# Altium PCB JacdacRgbBar8Ec30 alt 1 122.PcbDoc
Units mm, origin at the board's own origin, x right, y up, seen from the top; angles counter-clockwise.
Board outline 16.5 x 75 mm, 2 copper layers (Top Layer, Bottom Layer), stack 1.525 mm thick; 39 components, 18 nets, 114 pads, 15 vias.
Unrouted connection lines stored in the file: 7.
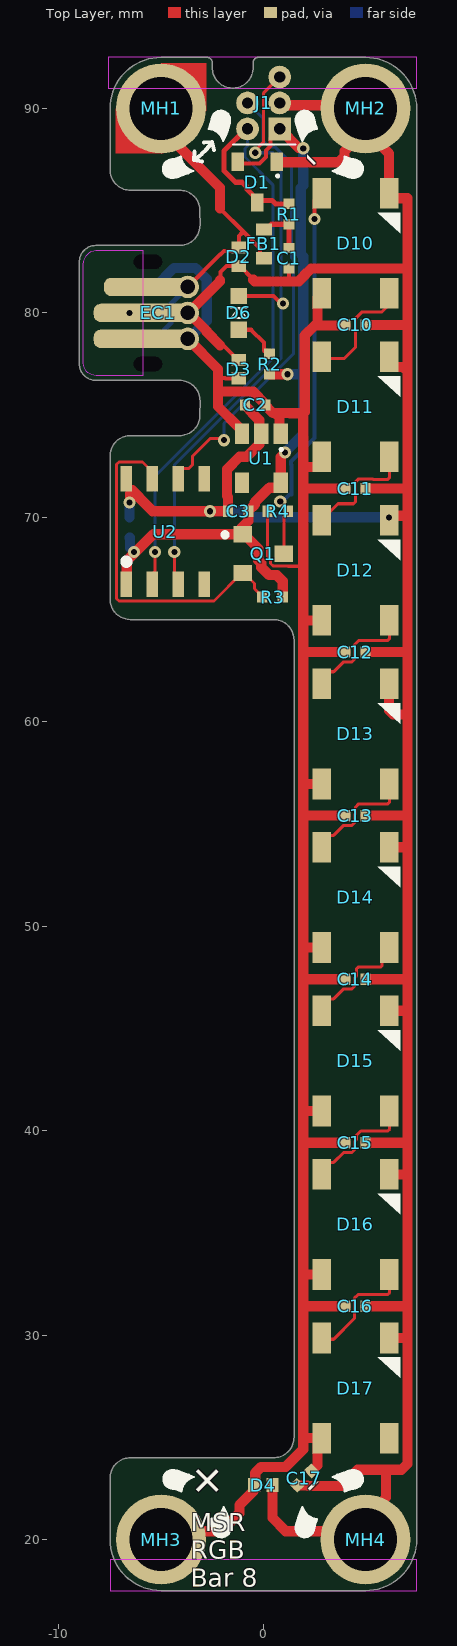
[diagram p0: Top Layer view]
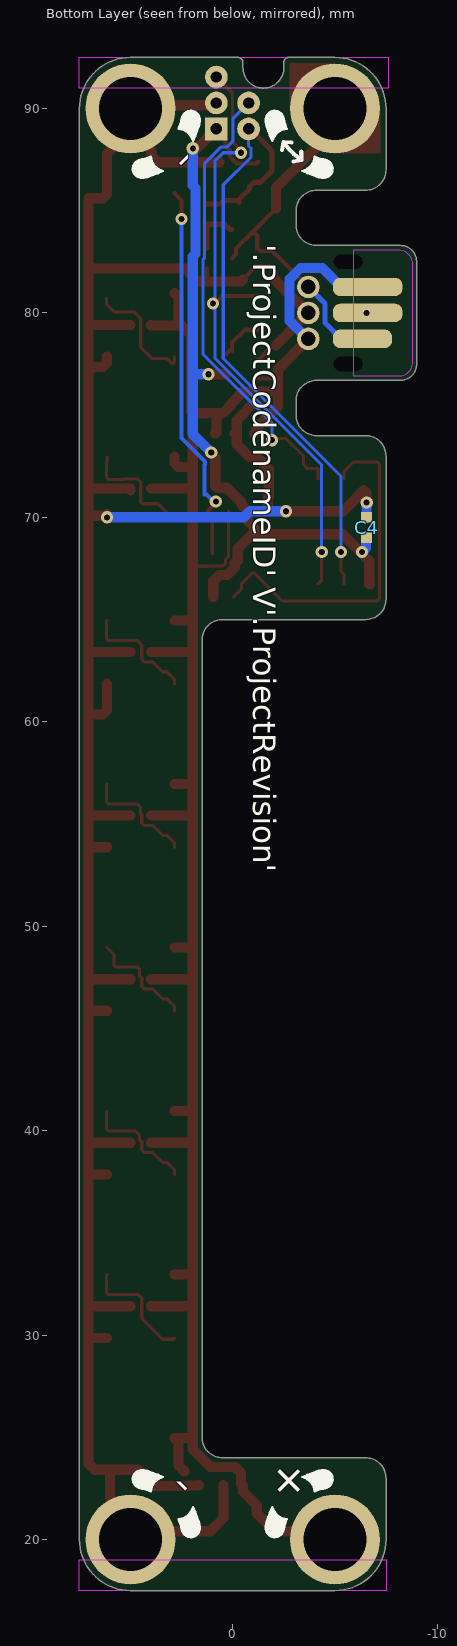
[diagram p1: Bottom Layer view, seen from below]

## Layer stack, top to bottom
Top Solder: solder mask 0.0102, Solder Resist, Dk 3.5
Top Layer: signal copper 0.0356
Dielectric 1: core 1.454, FR-4, Dk 4.2
Bottom Layer: signal copper 0.0356
Bottom Solder: solder mask 0.0102, Solder Resist, Dk 3.5

## Board outline
-7.5,23 cw(c-6.5,23) -6.5,24 0.5,24 ccw(c0.5,25) 1.5,25 1.5,64 ccw(c0.5,64) 0.5,65 -6.5,65 cw(c-6.5,66) -7.5,66 -7.5,73 cw(c-6.5,73) -6.5,74 -4.1,74 ccw(c-4.1,75) -3.1,75 -3.1,75.7 ccw(c-4.1,75.7) -4.1,76.7 -8.2,76.7 cw(c-8.2,77.5) -9,77.5 -9,82.5 cw(c-8.2,82.5) -8.2,83.3 -4.1,83.3 -4.098,83.3 ccw(c-4.098,84.3) -3.098,84.3 -3.1,84.3 -3.1,85 ccw(c-4.1,85) -4.1,86 -6.5,86 cw(c-6.5,87) -7.5,87 -7.5,86.97 -7.5,90 cw(c-5,90) -5,92.5 -2.75,92.5 cw(c-2.75,92.25) -2.5,92.25 -2.5,92 ccw(c-1.5,92) -0.5,92 -0.5,92.25 cw(c-0.25,92.25) -0.25,92.5 5,92.5 cw(c5,90) 7.5,90 7.5,84 7.5,20 cw(c5,20) 5,17.5 -5,17.5 cw(c-5,20) -7.5,20

## Design rules (kind name [scope] priority, off if disabled: settings)
AssemblyTestPointUsage [All] p1: valid=2
BoardOutlineClearance [All] p1: gap=0.3 ignorepadtopadclearanceinfootprint=FALSE except(0: Arc-SplitContinuation Track-SplitContinuation SMDPad-SplitContinuation THPad-SplitContinuation Via-SplitContinuation Fill-SplitContinuation Poly-SplitContinuation Region-OutlineEdge Region-SplitContinuation Text-OutlineEdge Text-SplitContinuation; 0.2: Track-OutlineEdge Fill-CavityEdge Fill-CutoutEdge Fill-SplitBarrior Poly-CavityEdge Poly-CutoutEdge Poly-SplitBarrior Text-CavityEdge Text-CutoutEdge Text-SplitBarrior; 0.25: SMDPad-OutlineEdge)
Clearance [All] p1: gap=0.125 ignorepadtopadclearanceinfootprint=FALSE except(0: Arc-Hole Track-Hole SMDPad-Hole THPad-Hole Via-Hole Fill-Hole Poly-Hole Region-Hole Text-Hole)
ComponentClearance [All] p1: gap=0.1 collisioncheckmode=3 verticalgap=0.254 showdistances=FALSE
DiffPairsRouting [All] p1: maxlimit=2 minlimit=0.15 mostfreqgap=0.15 toplayer_minwidth=0.15 toplayer_maxwidth=2 toplayer_prefwidth=0.15 bottomlayer_minwidth=0.15 bottomlayer_maxwidth=2 bottomlayer_prefwidth=0.15 substack1={CB9D278B-8BF5-444A-AAF4-837A2A9DF42D} toplayer_{cb9d278b-8bf5-444a-aaf4-837a2a9df42d}_minwidth=0.381 toplayer_{cb9d278b-8bf5-444a-aaf4-837a2a9df42d}_maxwidth=0.381 toplayer_{cb9d278b-8bf5-444a-aaf4-837a2a9df42d}_prefwidth=0.381 bottomlayer_{cb9d278b-8bf5-444a-aaf4-837a2a9df42d}_minwidth=0.381 bottomlayer_{cb9d278b-8bf5-444a-aaf4-837a2a9df42d}_maxwidth=0.381 bottomlayer_{cb9d278b-8bf5-444a-aaf4-837a2a9df42d}_prefwidth=0.381 substack2={826B8647-A721-4255-895A-19F9591B9CD1} toplayer_{826b8647-a721-4255-895a-19f9591b9cd1}_minwidth=0.381 toplayer_{826b8647-a721-4255-895a-19f9591b9cd1}_maxwidth=0.381 toplayer_{826b8647-a721-4255-895a-19f9591b9cd1}_prefwidth=0.381 bottomlayer_{826b8647-a721-4255-895a-19f9591b9cd1}_minwidth=0.381 bottomlayer_{826b8647-a721-4255-895a-19f9591b9cd1}_maxwidth=0.381 bottomlayer_{826b8647-a721-4255-895a-19f9591b9cd1}_prefwidth=0.381 substack3={E64FCAF4-1BC8-437D-B1E0-0E5F2DC0F59E} toplayer_{e64fcaf4-1bc8-437d-b1e0-0e5f2dc0f59e}_minwidth=0.381 toplayer_{e64fcaf4-1bc8-437d-b1e0-0e5f2dc0f59e}_maxwidth=0.381 toplayer_{e64fcaf4-1bc8-437d-b1e0-0e5f2dc0f59e}_prefwidth=0.381 bottomlayer_{e64fcaf4-1bc8-437d-b1e0-0e5f2dc0f59e}_minwidth=0.381 bottomlayer_{e64fcaf4-1bc8-437d-b1e0-0e5f2dc0f59e}_maxwidth=0.381 bottomlayer_{e64fcaf4-1bc8-437d-b1e0-0e5f2dc0f59e}_prefwidth=0.381 substack4={E61CE66C-507C-4E1E-8E83-C905434AFC1C} toplayer_{e61ce66c-507c-4e1e-8e83-c905434afc1c}_minwidth=0.381 toplayer_{e61ce66c-507c-4e1e-8e83-c905434afc1c}_maxwidth=0.381 toplayer_{e61ce66c-507c-4e1e-8e83-c905434afc1c}_prefwidth=0.381 bottomlayer_{e61ce66c-507c-4e1e-8e83-c905434afc1c}_minwidth=0.381 bottomlayer_{e61ce66c-507c-4e1e-8e83-c905434afc1c}_maxwidth=0.381 bottomlayer_{e61ce66c-507c-4e1e-8e83-c905434afc1c}_prefwidth=0.381 maxuncoupledlength=25
FabricationTestPointUsage [All] p1: valid=2 allowmultiple=FALSE
HoleSize [All] p1: absolutevalues=TRUE maxlimit=3.1 minlimit=0.2 maxpercent=80.000 minpercent=20.000
MinimumSolderMaskSliver [All] p1: minsoldermaskwidth=0.005
PlaneClearance [All] p1: clearance=0.3
PlaneConnect [All] p1: planeconnectstyle=Relief reliefexpansion=0.5 reliefentries=4 reliefconductorwidth=0.2 reliefairgap=0.3
PolygonConnect "PolygonConnect GND" [isVIA] p1: connectstyle=Relief reliefconductorwidth=0.2 reliefentries=4 polygonreliefangle="90 Angle" airgapwidth=0.2
PolygonConnect [All] p2: connectstyle=Relief reliefconductorwidth=0.2 reliefentries=4 polygonreliefangle="90 Angle" airgapwidth=0.2
RoutingVias [All] p1: holewidth=0.3 width=0.6 viastyle="Through Hole" minholewidth=0.3 minwidth=0.6 maxholewidth=0.5 maxwidth=0.8
SilkToSilkClearance [All] p1: silktosilkclearance=0.001
SilkToSolderMaskClearance [IsPad] p1: minsilkscreentomaskgap=0.05 clearancetoexposedcopper=TRUE
SolderMaskExpansion [All] p1: expansion=0.075 istentingtop=FALSE
Width [All] p1: maxlimit=2 minlimit=0.15 preferedwidth=0.15 substack1={CB9D278B-8BF5-444A-AAF4-837A2A9DF42D} substack2={826B8647-A721-4255-895A-19F9591B9CD1} substack3={E64FCAF4-1BC8-437D-B1E0-0E5F2DC0F59E} substack4={E61CE66C-507C-4E1E-8E83-C905434AFC1C} minimp=50.000000 maximp=50.000000 favimp=50.000000
20 further rules are at their usual default settings.

## Components (designator, comment, footprint, x,y, rotation, side; value= is the part's Value field where it differs from the comment)
C1 "CL05C330JB5NNNC" "C0402_0.55MM - without outline" 1.25,82.676 r90 top
C2 "CL05A105KP5NNNC" "C0402_0.55MM - without outline" -0.4,75.5 r0 top
C3 "CL05A105KP5NNNC" "C0402_0.55MM - without outline" -1.225,70.3 r0 top
C4 "CL05A105KP5NNNC" "C0402_0.55MM - without outline" -6.55,69.5 r270 bottom
C10 "CL05B104KP5NNNC" "C0402_0.55MM - without outline" 4.5,79.409 r180 top
C11 "CL05B104KP5NNNC" "C0402_0.55MM - without outline" 4.5,71.409 r180 top
C12 "CL05B104KP5NNNC" "C0402_0.55MM - without outline" 4.5,63.409 r180 top
C13 "CL05B104KP5NNNC" "C0402_0.55MM - without outline" 4.5,55.41 r180 top
C14 "CL05B104KP5NNNC" "C0402_0.55MM - without outline" 4.5,47.41 r180 top
C15 "CL05B104KP5NNNC" "C0402_0.55MM - without outline" 4.5,39.409 r180 top
C16 "CL05B104KP5NNNC" "C0402_0.55MM - without outline" 4.5,31.41 r180 top
C17 "CL05B104KP5NNNC" "C0402_0.55MM - without outline" 2,23.007 r45 top
D1 "BAT54S" "NXP-BAT54S-TO-236AB - WITHOUT OUTLINE" -0.3,86.4 r270 top
D2 "RCLAMP0521P-N" "TVS 0402 - XL" -1.2,82.75 r270 top
D3 "RCLAMP0521P-N" "TVS 0402 - XL" -1.2,77.25 r90 top
D4 "RCLAMP0521P-N" "TVS 0402 - XL" 0,22.662 r0 top
D6 "Everlight Elec'''" "0603 Orange - without outline" -1.2,80 r270 top
D10 "WS2812E" WS2812E-5050 4.5,83.409 r90 top
D11 "WS2812E" WS2812E-5050 4.5,75.409 r90 top
D12 "WS2812E" WS2812E-5050 4.5,67.409 r90 top
D13 "WS2812E" WS2812E-5050 4.5,59.409 r90 top
D14 "WS2812E" WS2812E-5050 4.5,51.41 r90 top
D15 "WS2812E" WS2812E-5050 4.5,43.41 r90 top
D16 "WS2812E" WS2812E-5050 4.5,35.41 r90 top
D17 "WS2812E" WS2812E-5050 4.5,27.41 r90 top
EC1 "3 pin JACDAC edge connector" JACDAC_EDGE_CONNECTOR_NO_TRACES -3.15,80 r90 top
FB1 "TDK MPZ1608S102ATA00" "TDK MPZ1608 0.8mm - without outline" 0.03,83.375 r90 top
J1 "Hack Connect Mini 1.27 mm pitch 2-row" HACK_CONNECT_MINI_5_X_1_27_0.559mm_TH 0.8,89 r0 top
MH1 "MH_7.0MMK_4.4MMC_3.1MMD_PTH" MH_7.0MMK_4.4MMC_3.1MMD_PTH -5,90 r0 top
MH2 "MH_7.0MMK_4.4MMC_3.1MMD_PTH" MH_7.0MMK_4.4MMC_3.1MMD_PTH 5,90 r180 top
MH3 "MH_7.0MMK_4.4MMC_3.1MMD_PTH" MH_7.0MMK_4.4MMC_3.1MMD_PTH -5,20 r0 top
MH4 "MH_7.0MMK_4.4MMC_3.1MMD_PTH" MH_7.0MMK_4.4MMC_3.1MMD_PTH 5,20 r180 top
Q1 "2N7002K" SOT-23 0,68.226 r0 top
R1 "RC0402FR-07220RL" "R0402 - Without outline" 1.25,84.837 r270 top
R2 "RC0402FR-071KL" "R0402 - Without outline" 0.301,77.5 r270 top
R3 "10k" "R0402 - Without outline" 0.45,66.1 r180 top
R4 "10k" "R0402 - Without outline" 0.7,70.3 r0 top
U1 "LDO 3.3V/300 mA" "ON_SEMI-SOT23-5 - WITHOUT OUTLINE" -0.1,72.9 r270 top
U2 "PFS122-S08" SOP-8 -4.8,69.307 r90 top

## Footprints (in the part's own frame and the unit in brackets; to place one, negate y for a bottom-side part, rotate by r counter-clockwise, add the part's x,y. Pads: shape width x height; smd on the part's side, far side on the other; paste and mask are expansions set on the pad)
"0603 Orange - without outline" [mm]
  rect 0.8x0.8 smd paste-0.05: 1(-0.825,0) 2(0.825,0)
  silkscreen extent -0.25,-0.38 0.25,0.38, body extent -0.8,-0.4 0.8,0.4, height 0.54
"C0402_0.55MM - without outline" [mm]
  rect 0.5x0.55 smd: 1(-0.5,0) 2(0.5,0)
  body extent -0.5,-0.25 0.5,0.25, height 0.55
HACK_CONNECT_MINI_5_X_1_27_0.559mm_TH [mm] "50mil by 62mil pitch 22mil TH"
  rect 1.11x1.11 hole 0.559: 1(0,0)
  round 1.11 hole 0.559: 2(-1.575,0) 3(0,1.27) 4(-1.575,1.27) 5(0,2.54)
  silkscreen extent -2.29,-0.76 0.76,-0.76
JACDAC_EDGE_CONNECTOR_NO_TRACES [mm] "Jacdac 3 pin connector with no traces"
  rrect78% 0.9x2.9 smd far side paste-1 mask+0: 1(-1.27,3.2)
  rrect78% 0.9x4.3 smd paste-1 mask+0: 1(1.27,2.5)
  round 1.1 hole 0.71 paste-0.254 mask+0: 1(1.27,0.55) 2(0,0.55) 3(-1.27,0.55)
  rrect78% 0.9x3.4 smd far side paste-1 mask+0: 2(0,3.45) 2(0,3.45) 3(1.27,3.45)
  rrect78% 0.9x4.8 smd paste-1 mask+0: 2(0,2.75) 3(-1.27,2.75)
  round 0 hole 0.7 slot 1.4 at 90 deg unplated: ""(-2.5,2.5) ""(2.5,2.5)
  Top Layer keep-out region: -3.075,2.75 -3.07,5.033 -2.987,5.341 -2.761,5.567 -2.453,5.65 -2.453,5.65 2.27,5.65 2.545,5.635 2.794,5.516 2.978,5.31 3.07,5.05 3.07,5.05 3.07,2.75
  Bottom Layer lines w0.2: -1.27,0.85 -1.126,0.85
  Bottom Layer keep-out region: -3.07,2.75 -3.07,5.033 -3.023,5.269 -2.889,5.469 -2.689,5.603 -2.453,5.65 -2.453,5.65 2.27,5.65 2.546,5.635 2.794,5.516 2.978,5.31 3.07,5.05 3.07,5.05 3.07,2.75
MH_7.0MMK_4.4MMC_3.1MMD_PTH [mm] "Jacdac mounting hole 7.0mm clearance, 4.4 annualar ring and 3.1mm PTH"
  round 4.4 hole 3.08 mask+0.3: 1(0,0)
"NXP-BAT54S-TO-236AB - WITHOUT OUTLINE" [mm] "SOT23, 3-Leads, Body 2.90x2.30mm, Pitch 0.95mm, IPC Medium Density"
  rect 0.9x0.6 smd: 1(-1,0.95) 2(-1,-0.95) 3(1,0)
  silkscreen extent -0.35,0.95 -0.25,1.05, body extent -1.32,-1.5 1.32,1.5, height 1.12
"ON_SEMI-SOT23-5 - WITHOUT OUTLINE" [mm]
  rect 1x0.7 smd: 1(-1.2,0.95) 2(-1.2,0) 3(-1.2,-0.95) 4(1.2,-0.95) 5(1.2,0.95)
  silkscreen extent -0.47,0.93 -0.38,1.02, body extent -1.5,-1.57 1.5,1.58, height 1.1
"R0402 - Without outline" [mm]
  rect 0.5x0.55 smd: 1(-0.5,0) 2(0.5,0)
  body extent -0.5,-0.25 0.5,0.25, height 0.35
SOP-8 [mm] "Pitch:1.27mm,Width:150mil"
  rect 1.25x0.55 smd: 1(-2.575,1.905) 2(-2.575,0.635) 3(-2.575,-0.635) 4(-2.575,-1.905) 5(2.575,-1.905) 6(2.575,-0.635) 7(2.575,0.635) 8(2.575,1.905)
  silkscreen extent -1.52,1.85 -1.43,1.95, body extent -3,-2.55 3,2.54, height 1.3
SOT-23 [mm] "SOT23, 3-Leads, Body 2.90x2.45mm, Pitch 0.95mm, IPC Medium Density"
  rect 0.9x0.8 smd: 1(-1,0.95) 2(-1,-0.95) 3(1,0)
  silkscreen extent -1.97,0.83 -1.78,1.02, body extent -1.27,-1.5 1.23,1.5, height 1.1
"TDK MPZ1608 0.8mm - without outline" [mm]
  rect 0.6x0.8 smd paste-0.1: 1(-0.7,0) 2(0.7,0)
  body extent -0.8,-0.4 0.8,0.4, height 0.8
"TVS 0402 - XL" [mm] "TVS 0402 RoHS"
  rect 0.6x0.7 smd paste-0.06 mask+0.05: 1(-0.45,0) 2(0.45,0)
  body extent -0.5,-0.3 0.5,0.3, height 0.5
WS2812E-5050 [mm] "SMD-5050 Light Emitting Diodes"
  rect 1.5x0.9 smd: 1(-2.45,1.65) 2(-2.45,-1.65) 3(2.45,-1.65) 4(2.45,1.65)
  silkscreen extent 0.5,-2.2 1.5,-1.1, body extent -2.68,-2.45 2.67,2.5, height 1.5

## Part data
C1: "CAP CER 33PF 50V C0G/NP0 0402", Capacitance=33pF, Case Code (Imperial)=0402, Case Code (Metric)=1005, Dielectric=C0G, Manufacturer=Samsung, Max Operating Temperature=125°C, Min Operating Temperature=-55°C, Package Quantity=1, Supplier Part Number 1=1276-1272-1-ND, Temperature Coefficient=300ppm/°C, Tolerance=5%, Voltage=50V, Case/Package=0402, Category="Ceramic Capacitors", ComponentLink1Description="Online datasheet", ComponentLink1URL=https://datasheet.ciiva.com/15195/getdatasheetpartid-355282-15195687.pdf, Construction=Flat, Contact Plating=Tin, Depth=0.5mm, Height=0.5mm, Lead Free="Lead Free", Length=1mm, Manufacturer Part Number=CL05C330JB5NNNC, Material=Ceramic, Mount="Surface Mount", Packaging="Tape and Reel", Pricing 1="1=0.10000, 10=0.02300, 50=0.01260, 100=0.01040, 500=0.00740, 1000=0.00582, 2500=0.00529, 5000=0.00487 (USD)", Pricing 2="1=0.12500, 25=0.02900, 100=0.01300, 250=0.01100, 500=0.00900, 1000=0.00600 (USD)", Pricing 3="1=0.10000, 10=0.01400, 50=0.01400, 100=0.01100, 1000=0.00600, 10000=0.00400 (USD)", Pricing 4="150=0.01120, 500=0.00860, 2500=0.00640, 5000=0.00550 (GBP)", Radiation Hardening=No, RoHS=Yes, RoHS Compliant=Yes, Series=CL, Stock 1=5436088, Stock 2=45340, Stock 3=8877, Stock 4=10934, Supplier 1=Digi-Key, Supplier 2=Newark, Supplier 3=Mouser, Supplier 4=Farnell, Supplier Part Number 2=82AC9259, Supplier Part Number 3=187-CL05C330JB5NNNC, Supplier Part Number 4=3013373RL, Thickness=0.022inch, Voltage Rating=50V, Voltage Rating (DC)=50V, Width=0.02inch
C2 C3 C4: "CAP CER 1UF 10V X5R 0402", Capacitance=1µF, Case Code (Imperial)=0402, Case Code (Metric)=1005, Dielectric=X5R, Manufacturer=Samsung, Max Operating Temperature=85°C, Min Operating Temperature=-55°C, Package Quantity=1, Supplier Part Number 1=1276-1076-1-ND, Tolerance=10%, Voltage Rating=10V, Case/Package=0402, Category=Capacitors, Checked=?, ComponentLink1Description="Online datasheet", ComponentLink1URL=https://datasheet.ciiva.com/15195/getdatasheetpartid-358390-15195630.pdf, Contact Plating=Tin, Created=DG, Depth=0.5mm, Height=0.5mm, Length=1mm, Manufacturer Part Number=CL05A105KP5NNNC, Material=Ceramic, Mount="Surface Mount", Packaging="Tape and Reel", Pricing 1="1=0.10000, 10=0.03900, 50=0.02100, 100=0.01720, 500=0.01228, 1000=0.00965, 2500=0.00877, 5000=0.00807 (USD)", Pricing 2="1=0.10000, 10=0.04200, 100=0.01800, 500=0.01300, 1000=0.01000, 2500=0.00900 (USD)", Pricing 3="10=0.02450, 100=0.02000, 500=0.01310, 2500=0.00920, 5000=0.00810, 10000=0.00640, 50000=0.00490 (GBP)", Radiation Hardening=No, RoHS=Yes, Stock 1=5705569, Stock 2=928941, Stock 3=53670, Supplier 1=Digi-Key, Supplier 2=Mouser, Supplier 3=Farnell, Supplier Part Number 2=187-CL05A105KP5NNNC, Supplier Part Number 3=3013329, Thickness=0.022inch, Width=0.02inch
C10 C11 C12 C13 C14 C15 C16 C17: "CAP CER 0.1UF 10V X7R 0402", Capacitance=100nF, Case Code (Imperial)=0402, Case Code (Metric)=1005, Dielectric=X7R, Manufacturer=Samsung, Max Operating Temperature=125°C, Min Operating Temperature=-55°C, Package Quantity=1, Supplier Part Number 1=1276-1002-1-ND, Tolerance=10%, Voltage Rating=10V, Case/Package=0402, Category="Ceramic Capacitors", Checked=?, ComponentLink1Description="Samsung datasheet online", ComponentLink1URL=https://datasheet.ciiva.com/15165/getdatasheetpartid-37100-15165107.pdf, Contact Plating=Tin, Created=DG, Depth=0.5mm, Height=0.5mm, Length=1mm, Manufacturer Part Number=CL05B104KP5NNNC, Mount="Surface Mount", Packaging="Tape and Reel", Pricing 1="1=0.10000, 10=0.02500, 50=0.01380, 100=0.01130, 500=0.00804, 1000=0.00632, 2500=0.00575, 5000=0.00529 (USD)", Pricing 2="10000=0.00400, 20000=0.00400, 50000=0.00400 (USD)", Pricing 3="10=0.01620, 100=0.01310, 500=0.00740, 2500=0.00600, 5000=0.00470, 10000=0.00400, 50000=0.00320 (GBP)", Pricing 4="1=0.09000, 25=0.02300, 100=0.01000, 250=0.00900, 500=0.00700, 1000=0.00500, 2500=0.00500 (USD)", Pricing 5="1=0.00460, 500=0.00340, 1500=0.00320, 2500=0.00310, 5000=0.00300 (USD)", Radiation Hardening=No, RoHS=Yes, Stock 1=17321183, Stock 2=984124, Stock 3=39022, Stock 4=56730, Stock 5=20877033, Supplier 1=Digi-Key, Supplier 2=Mouser, Supplier 3=Farnell, Supplier 4=Newark, Supplier 5="Future Electronics", Supplier Part Number 2=187-CL05B104KP5NNNC, Supplier Part Number 3=3013351, Supplier Part Number 4=82AC9219, Supplier Part Number 5=9032525, Thickness=0.022inch, Width=0.02inch
D1: "DIODE ARRAY SCHOTTKY 30V SOT23", Manufacturer=Nexperia, Manufacturer Part Number=BAT54S,235, Supplier Part Number 1=1727-1868-1-ND, Category="Rectifier Diodes", ComponentLink1Description="NXP datasheet online", ComponentLink1URL=https://assets.nexperia.com/documents/data-sheet/BAT54_SER.pdf, Pricing 1="1=0.13000, 10=0.11900, 100=0.05610, 500=0.03326, 1000=0.02185, 5000=0.02138 (USD)", RoHS=No, Stock 1=14011, Supplier 1=Digi-Key, Supplier 2=Mouser, Supplier 3=RSComponents, Supplier Part Number 2=771-BAT54S235, Supplier Part Number 3=1707990
D2 D3 D4: "Bidirectional 5V (Max) 6V 16V 3.5A (8/20us) 0402 TVS RoHS", Manufacturer="Born Semiconductor", Package=0402, Supplier1 Part Number=C316043, Checked By=?, ComponentLink1Description="Online datasheet", ComponentLink1URL=https://datasheet.lcsc.com/szlcsc/Bourne-Semicon-Shenzhen-RCLAMP0521P-N_C316043.pdf, Created By="D Gakure", Manufacturer Part Number=RCLAMP0521P-N, Supplier1=LCSC
D6: library part 19-217/S2C-AQ1R1B/3T, "LED ORANGE DIFFUSED 1608 SMD", Case Code (Imperial)=0603, Case Code (Metric)=1608, Color=Orange, Forward Voltage=2.05V, Lens Color=White, Manufacturer="Everlight Elec", Supplier 1 Part Number=C146215, Test Current=25mA, Case/Package=0603, Category=LEDs, Colour=Orange, ComponentLink1Description="Online datasheet", ComponentLink1URL=https://datasheet.lcsc.com/lcsc/1912171731_Everlight-Elec-19-217-S2C-AQ1R1B-3T_C146215.pdf, Dominant Wavelength=605nm, Height=0.65mm, Lead Free="Lead Free", Length=1.6mm, Lens Transparency=Diffused, Luminous Intensity=100mcd, Manufacturer Part Number=19-217/S2C-AQ1R1B/3T, Mount="Surface Mount", RoHS=Yes, Supplier 1=LCSC, Width=0.8mm
D10 D11 D12 D13 D14 D15 D16 D17: library part WS2812E-5050, "WS2812E 5050 RGB LED WITH INTEGRATED DRIVER", Color=Blue,Green,Red, Manufacturer=Worldsemi, Supplier 1 Part Number 3=C139127, Category=LEDs, ComponentLink1Description="Online datasheet", ComponentLink1URL=https://datasheet.lcsc.com/lcsc/1811151230_Worldsemi-WS2812E_C139127.pdf, Length=5mm, Manufacturer Part Number=WS2812E, Mount="Surface Mount", RoHS=Yes, Supplier 1=LCSC, Width=5mm
EC1: library part "Jacdac edge connector", "3 pin Jacdac edge connector 1.27mm pitch", Manufacturer Part Number=JACDAC_EDGE_CONNECTOR, Checked By=?, ComponentLink1Description="Yuliang JACDAC cable connector drawing online", ComponentLink1URL=https://github.com/microsoft/jacdac-mdk/blob/main/connector/JACDAC-Connector-by-Yuliang-2020-11-28.pdf, ComponentLink2Description="JACDAC PCB edge connector spec onlin", ComponentLink2URL=https://github.com/microsoft/jacdac-mdk/blob/main/connector/JACDAC_PCB_Edge_Connector_Drawing_JD-PEC-01_rev_01.pdf, Created By="D. Gakure", PCB Type="1.6mm FR4"
FB1: "0603 1k@100MHz 0.8A chip", Case Code (Imperial)=0603, Case Code (Metric)=1608, Current Rating=800mA, DC Resistance (DCR)=300mR, Manufacturer=TDK, Manufacturer Part Number=MPZ1608S102ATA00, Package Quantity=4000, Supplier Part Number 1=445-8694-1-ND, Tolerance=25%, Case/Package=0603, ComponentLink2Description="datasheet online", ComponentLink2URL=https://www.mouser.co.uk/datasheet/2/400/eads_commercial_power_mpz1608_en-923650.pdf, ComponentLink3Description=datasheet, ComponentLink3URL="Y:\System\Altium\Libraries 2014\TDK\Datasheets\eads_commercial_power_mpz1608_en-923650.pdf", Core Material=Ferrite, Height=0.037inch, Impedance="1kR @ 100MHz", Length=0.063inch, Max DC Current=800mA, Mount="Surface Mount", Packaging="Tape and Reel", Pricing 1="1=0.1, 10=0.079, 25=0.0716, 50=0.0644, 100=0.0472, 250=0.03432, 500=0.03146, 1000=0.02717 (USD)", Stock 1=113542, Supplier 1=Digi-Key, Supplier 2=Mouser, Supplier Part Number 2=810-MPZ1608S102ATA00, Width=0.031inch
J1: library part HACK_CONNECT_MINI
MH1 MH2 MH3 MH4: "Mounting Hole 7.0mm keepout, 4.4mm annualar ring and 3.1mm Drill PTH", Annular Ring=4.4mm, Hole Clearance=7.0mm, Hole Diameter=3.1mm, Hole Size=M3, Hole Type=PTH
Q1: library part "2N7002K (2)", "MOSFET Transistor, N Channel, 300 mA, 60 V, 2 ohm, 10 V, 2.5 V", Case/Package=SOT-23, Continuous Drain Current (ID)=300mA, Drain to Source Breakdown Voltage=60V, Drain to Source Resistance=2R, Gate to Source Voltage (Vgs)=20V, Input Capacitance=50pF, Manufacturer="ON Semiconductor / Fairchild", Max Operating Temperature=150°C, Max Power Dissipation=350mW, Min Operating Temperature=-55°C, Package Quantity=1, Supplier Part Number 1=2N7002KCT-ND, Threshold Voltage=2.5V, Category=MOSFETs, Checked By=?, ComponentLink1Description="Online datasheet", ComponentLink1URL=https://www.onsemi.com/pdf/datasheet/2n7002k-d.pdf, Contact Plating=Tin,Matte, Created By="D. Gakure", Drain to Source Voltage (Vdss)=60V, Drain-source On Resistance-Max=2R, Element Configuration=Single, Height=1.2mm, Lead Free="Lead Free", Length=2.92mm, Manufacturer Part Number=2N7002K, Mount="Surface Mount", Number of Elements=1, Number of Pins=3, On-State Resistance=2R, Packaging="Tape and Reel", Polarity=N-CHANNEL, Power Dissipation=350mW, Pricing 1="1=0.40000, 10=0.32500, 25=0.27240, 100=0.17240, 500=0.11344, 1000=0.07714 (USD)", Pricing 2="1=0.40000, 10=0.27300, 50=0.27300, 100=0.13400, 1000=0.07800, 10000=0.05100 (USD)", Pricing 3="5=0.34800, 10=0.23500, 100=0.09100, 500=0.05850, 3000=0.04630, 9000=0.03860, 24000=0.03750, 45000=0.03530 (GBP)", Radiation Hardening=No, Rds On Max=2R, REACH SVHC="No SVHC", RoHS=Yes, Stock 1=53564, Stock 2=111825, Stock 3=101059, Supplier 1=Digi-Key, Supplier 2=Mouser, Supplier 3=Farnell, Supplier Part Number 2=512-2N7002K, Supplier Part Number 3=2453382, Turn-Off Delay Time=30ns, Turn-On Delay Time=5ns, Voltage=60V, Width=1.3mm
R1: "RES SMD 220 OHM 1% 1/16W 0402", Case Code (Imperial)=0402, Case Code (Metric)=1005, Manufacturer=Yageo, Max Operating Temperature=155°C, Max Power Dissipation=63mW, Min Operating Temperature=-55°C, Package Quantity=1, Power Rating=62.5mW, Resistance=220R, Resistor Type="Thick Film", Supplier Part Number 1=311-220LRCT-ND, Temperature Coefficient=100ppm/°C, Tolerance=1%, Voltage Rating=50V, Case/Package=0402, Category=Resistors, Checked=?, ComponentLink1Description="Online datasheet", ComponentLink1URL=https://datasheet.ciiva.com/11819/0900766b80c66297-11819466.pdf, Created=D.G, Depth=0.5mm, Features="Moisture Resistant", Height=0.016inch, Lead Free="Lead Free", Length=1mm, Manufacturer Part Number=RC0402FR-07220RL, Military Standard=Not, Number of Pins=2, Number of Terminations=2, Packaging="Tape and Reel", Pricing 1="1=0.10000, 10=0.01400, 100=0.00580, 1000=0.00262, 2500=0.00228, 5000=0.00188 (USD)", Pricing 2="1=0.10000, 10=0.01200, 100=0.00400, 1000=0.00400, 2500=0.00400, 10000=0.00300 (USD)", Pricing 3="1=0.08130, 25=0.01210, 100=0.01120, 250=0.01030, 500=0.00900 (GBP)", REACH SVHC="No SVHC", RoHS=Yes, Stock 1=1286042, Stock 2=324625, Stock 3=18234, Supplier 1=Digi-Key, Supplier 2=Mouser, Supplier 3=Farnell, Supplier Part Number 2=603-RC0402FR-07220RL, Supplier Part Number 3=2147864, Termination=SMD/SMT, Voltage Rating (DC)=50V, Width=0.02inch
R2: "RES SMD 1K OHM 1% 1/16W 0402", Case Code (Imperial)=0402, Case Code (Metric)=1005, Manufacturer=Yageo, Max Operating Temperature=155°C, Min Operating Temperature=-55°C, Power Rating=62.5mW, Resistance=1k, Resistor Type="Thick Film", Supplier Part Number 1=311-1.00KLRDKR-ND, Temperature Coefficient=100ppm/°C, Tolerance=1%, Voltage Rating=50V, Case/Package=0402, Category=Resistors, Checked=?, ComponentLink2Description="Online datasheet", ComponentLink2URL=https://datasheet.ciiva.com/12666/pyu-rc0402-51-rohs-l-6-r-12666741.pdf, Created=D.G, Depth=0.5mm, Height=0.32mm, Lead Free="Lead Free", Length=1mm, Manufacturer Part Number=RC0402FR-071KL, Military Standard=Not, Number of Pins=2, Packaging="Tape and Reel", Pricing 1="1=0.10000, 10=0.01400, 100=0.00580, 1000=0.00262, 2500=0.00228, 5000=0.00188 (USD)", Pricing 2="1=0.10000, 10=0.01200, 100=0.00400, 1000=0.00400, 2500=0.00400, 10000=0.00300 (USD)", Pricing 3="1=0.08130, 25=0.01210, 100=0.01120, 250=0.01030, 500=0.00900 (GBP)", REACH SVHC=Unknown, RoHS=Yes, Stock 1=37591306, Stock 2=11912978, Stock 3=29900, Supplier 1=Digi-Key, Supplier 2=Mouser, Supplier 3=Farnell, Supplier Part Number 2=603-RC0402FR-071KL, Supplier Part Number 3=2132441, Termination=SMD/SMT, Voltage Rating (DC)=50V, Width=0.5mm
R3 R4: library part RC0402FR-0710KL, "RES SMD 10K OHM 1% 1/16W 0402", Case Code (Imperial)=0402, Case Code (Metric)=1005, Manufacturer=Yageo, Max Operating Temperature=155°C, Min Operating Temperature=-55°C, Power Rating=62.5mW, Resistance=10kR, Resistor Type="Thick Film", Supplier Part Number 1=311-10.0KLRCT-ND, Temperature Coefficient=100ppm/°C, Tolerance=1%, Voltage Rating=50V, Case/Package=0402, Category=Resistors, Checked=?, ComponentLink1Description=https://datasheet.ciiva.com/7660/38568-7660787.pdf?src-supplier=Element14, ComponentLink1URL=https://datasheet.ciiva.com/7660/38568-7660787.pdf?src-supplier=Element14, ComponentLink2Description=https://datasheet.ciiva.com/7849/1784430-7849813.pdf?src-supplier=Element14, ComponentLink2URL=https://datasheet.ciiva.com/7849/1784430-7849813.pdf?src-supplier=Element14, ComponentLink3Description=https://datasheet.ciiva.com/7849/1686128-7849814.pdf?src-supplier=Element14, ComponentLink3URL=https://datasheet.ciiva.com/7849/1686128-7849814.pdf?src-supplier=Element14, ComponentLink4Description=https://datasheet.ciiva.com/7849/1784430-7849815.pdf?src-supplier=Element14, ComponentLink4URL=https://datasheet.ciiva.com/7849/1784430-7849815.pdf?src-supplier=Element14, ComponentLink5Description=https://datasheet.ciiva.com/22747/1018594-22747512.pdf?src-supplier=Element14, ComponentLink5URL=https://datasheet.ciiva.com/22747/1018594-22747512.pdf?src-supplier=Element14, ComponentLink6Description=https://datasheet.ciiva.com/12667/pyu-rc0402-51-rohs-l-6-r-12667067.pdf?src-supplier=Mouser, ComponentLink6URL=https://datasheet.ciiva.com/12667/pyu-rc0402-51-rohs-l-6-r-12667067.pdf?src-supplier=Mouser, ComponentLink7Description=https://datasheet.ciiva.com/7983/1018594-7983486.pdf?src-supplier=Element14, ComponentLink7URL=https://datasheet.ciiva.com/7983/1018594-7983486.pdf?src-supplier=Element14, Created=DG, Depth=0.5mm, Height=0.32mm, Lead Free="Lead Free", Lead Pitch=0.2mm, Length=1mm, Manufacturer Part Number=RC0402FR-0710KL, Military Standard=Not, Number of Pins=2, Number of Terminations=2, Packaging="Tape and Reel", Pricing 1="1=0.10000, 10=0.01400, 100=0.00580, 1000=0.00262, 2500=0.00228, 5000=0.00188 (USD)", Pricing 2="1=0.10000, 10=0.01300, 100=0.00400, 1000=0.00300, 2500=0.00300, 10000=0.00200 (USD)", Pricing 3="10000=0.00350 (GBP)", REACH SVHC="No SVHC", RoHS=Yes, Stock 1=40173593, Stock 2=23672167, Stock 3=370000, Supplier 1=Digi-Key, Supplier 2=Mouser, Supplier 3=Farnell, Supplier Part Number 2=603-RC0402FR-0710KL, Supplier Part Number 3=2363463, Termination=SMD/SMT, Voltage Rating (DC)=50V, Width=0.5mm, Working Voltage=50V
U1: library part NCP114BSN330T1G, "CMOS Low Dropout Regulator (LDO), 300 mA 3.3V, Non-Active Discharge, TSOP5", Case/Package=TSOP, Manufacturer="ON Semiconductor", Max Input Voltage=5.5V, Max Operating Temperature=85°C, Max Output Current=300mA, Min Input Voltage=1.7V, Min Operating Temperature=-40°C, Output Voltage=3.3V, Quiescent Current=50uA, Supplier Part Number 1=NCP114BSN330T1GOSCT-ND, Accuracy=2%, Category="Voltage Regulators - Linear", ComponentLink1Description="Datasheet (online)", ComponentLink1URL=http://www.farnell.com/datasheets/2118270.pdf?src-supplier=Farnell, Lead Free="Lead Free", Manufacturer Part Number=NCP114BSN330T1G, Mount="Surface Mount", Number of Outputs=1, Number of Pins=5, Output Type=Fixed, Polarity=Positive, Pricing 1="1=0.45000, 10=0.33700, 25=0.29440, 100=0.19060, 250=0.15780, 500=0.12624, 1000=0.09679 (USD)", RoHS=Yes, RoHS Compliant=Yes, Stock 1=4067, Supplier 1=Digi-Key, Supplier 2=Mouser, Supplier 3=RSComponents, Supplier Part Number 2=863-NCP114BSN330T1G, Supplier Part Number 3=1263179
U2: library part PFS122-SO8, "8bit MTP MCU with 12-bit ADC", Manufacturer=PADAUK, Package=SOP-8, ComponentLink1Description="Online datasheet", ComponentLink1URL=http://www.padauk.com.tw/upload/doc/PFS122%20datasheet_EN_V001_20220518.pdf, Manufacturer Part Number=PFS122-S08

## Via types
v1: diameter 0.6, hole 0.3, Top Layer to Bottom Layer, 8 vias
v2: diameter 0.6, hole 0.3, Top Layer to Bottom Layer, tented both sides, 7 vias

## Nets (pads, with @x,y where several pads share a name; then routed paths per layer and width w, separated by ;. In a path a pad name is that pad's centre, name@x,y a point inside that pad or via, vN(x,y) a via of type N, cw(c..) or ccw(c..) an arc to the next point about the centre after c; other vN are vias at no path point)
3V3: C3.2 C4.2 D1.2 J1.1 Q1.1 R2.2 R3.1 U1.5 U2.1 | length 38.9
  Top Layer w0.2: D1.2 -1.161,87.311 -0.183,87.311 0.125,87.619 0.125,87.943 0.345,88.163 0.345,88.545 J1.1
  Top Layer w0.5: U2.1 -6.68,66.757 -6.68,67.875 -5.379,69.176 -0.95,69.176 -0.25,68.476 -0.25,67.906 -0.1,67.756 -0.1,67.556 0.281,67.176 0.657,67.176 0.95,66.883 R3.1 ; Q1.1@-1.1,69.45 -0.725,69.825 -0.725,70.325 -0.425,70.625 -0.425,70.73 0.295,71.45 0.75,71.45 0.85,71.55 U1.5 0.855,71.705 0.855,72.95 1.052,73.148 v1(1.052,73.175) ; R2.2 v2(1.181,77) ; J1.1 1.731,88.069 1.931,88.069 v2(1.95,88.05)
  Bottom Layer w0.5: C4.2 -6.525,69 -6.525,68.5 v2(-6.325,68.3) ; v1(1.052,73.175) 1.95,74.072 1.95,77 ; v2(1.181,77) 1.95,77 ; v2(1.95,88.05) 1.95,86.234 1.825,86.109 1.825,82.883 1.95,82.758 1.95,77
GND: C1.1 C2.1 C3.1 C4.1 C10.1 C11.1 C12.1 C13.1 C14.1 C15.1 C16.1 C17.1 D1.1 D2.2 D3.2 D4.2 D10.3 D11.3 D12.3 D13.3 D14.3 D15.3 D16.3 D17.3 EC1.2 J1.3 MH2.1 MH4.1 U1.2 U2.8 | length 154.5
  Top Layer w0.15: 1.25,81.574 1.282,81.542
  Top Layer w0.2: -2.12,78.42 -1.97,78.42 -1.25,77.7 D3.2 ; -2.12,81.6 -2.1,81.62 -2.1,82 -1.8,82.3 D2.2 -1.15,82.3 -0.495,81.645 -0.495,81.62 ; 1.25,81.574 C1.1
  Top Layer w0.5: v2(-6.55,70.73) -6.531,70.749 -6.531,71.197 -6.4,71.328 -6.095,71.023 -6.095,70.985 -5.41,70.3 v1(-2.61,70.3) C3.1 -1.725,70.995 -1.775,71.045 -1.775,72.355 -1.168,72.962 -0.807,72.962 -0.2,73.57 -0.2,74 U1.2 -0.2,74.2 -0.2,74.745 -0.525,75.07 -0.525,75.1 -0.9,75.475 C2.1 ; EC1.2@-3.7,80 EC1.2@-3.662,80 ; -2.12,78.42 -2.775,79.075 -2.775,79.113 EC1.2@-3.662,80 ; -2.12,81.6 -2.12,81.542 EC1.2@-3.662,80 ; -0.495,81.62 -0.417,81.542 1.282,81.542 1.732,81.542 2.025,81.835 2.025,81.865 2.336,82.176 7.05,82.176 ; D4.2 0.45,21.05 1.094,20.406 4.594,20.406 MH4.1 5,21.055 6,22.055 6,23.41 ; D1.1@0.65,87.38 0.655,87.375 3.675,87.375 3.968,87.668 3.968,87.913 MH2.1@5,88.945 ; J1.3 0.917,90.153 4.847,90.153 MH2.1 MH2.1@5,88.945 ; C17.1 1.664,22.636 2.164,22.636 2.186,22.614 3.818,22.614 3.84,22.636 3.842,22.636 4.615,23.41 6,23.41 ; C16.1 7.05,31.41 ; C15.1 7.05,39.409 ; C14.1 7.05,47.41 ; C13.1 7.05,55.41 ; C12.1 7.05,63.409 ; C11.1@5,71.309 C11.1 7.05,71.409 ; C10.1 7.05,79.409 ; D17.3 7.05,29.86 ; D16.3 7.05,37.86 ; D15.3 7.05,45.86 ; D14.3 7.05,53.86 ; D13.3 6.15,60.559 6.35,60.359 7.05,60.359 ; D12.3@6.15,70.159 v1(6.15,70) 6.225,70.075 7.05,70.075 ; D11.3 6.15,77.559 6.35,77.359 6.802,77.359 6.85,77.311 7.05,77.311 ; MH2.1@5,88.945 6.15,87.795 D10.3 6.15,85.807 6.35,85.607 7.05,85.607 7.05,82.176 ; 6,23.41 6.757,23.41 7.05,23.703 7.05,29.86 ; 7.05,29.86 7.05,31.41 ; 7.05,31.41 7.05,37.86 ; 7.05,37.86 7.05,39.409 ; 7.05,39.409 7.05,45.86 ; 7.05,45.86 7.05,47.41 ; 7.05,47.41 7.05,53.86 ; 7.05,53.86 7.05,55.41 ; 7.05,55.41 7.05,60.359 ; 7.05,60.359 7.05,63.409 ; 7.05,63.409 7.05,70.075 ; 7.05,70.075 7.05,71.409 ; 7.05,71.409 7.05,77.311 ; 7.05,77.311 7.05,79.409 ; 7.05,79.409 7.05,82.176
  Bottom Layer w0.5: C4.1 v2(-6.55,70.73) ; v1(-2.61,70.3) -0.839,70.3 -0.539,70 v1(6.15,70)
  other v2: -6.55,80
ICPCK: J1.4 U2.6 | length 22.6
  Top Layer w0.15: U2.6 -4.165,72.082 -4.165,72.382 -3.665,72.382 -3.459,72.589 -3.459,73.001 -2.61,73.85 -2,73.85 v1(-1.927,73.777)
  Bottom Layer w0.15: v1(-1.927,73.777) -1.927,74.599 1.464,77.99 1.464,82.607 1.375,82.696 1.375,87.314 0.578,88.111 0.296,88.111 -0.02,88.427 -0.02,89.515 J1.4
JD_DATA: D2.1 EC1.1 FB1.1 MH1.1 | length 17.8
  Top Layer w0.2: MH1.1@-5,89 MH1.1 ; EC1.1@-3.7,81.27 -2.12,82.85 -2.1,82.85 -1.925,83.025 -1.325,83.025 D2.1@-1.25,83.1 ; -2.12,85.108 -0.983,83.971 -0.17,83.158 -0.17,82.875 FB1.1 ; D2.1 -1.2,83.125 -1.2,83.754 -1.033,83.921
  Top Layer w0.5: MH1.1@-5,89 -2.12,86.12 -2.12,85.108
  Bottom Layer w0.25: EC1.1@-6.325,78.73 -5.3,78.73 -4.511,79.519 -4.511,80.459 EC1.1@-3.7,81.27
JD_DATA_MCU/ICPDA: D1.3 J1.2 R1.1 U2.2 | length 31.9
  Top Layer w0.15: U2.2 -5.435,66.932 -5.435,67.232 -5.3,67.367 v1(-5.3,68.3)
  Top Layer w0.25: J1.2 -0.854,89 -1.925,87.929 -1.925,86.956 -1.359,86.391 -1.041,86.391 -0.829,86.179 -0.829,86.079 D1.3@-0.3,85.55 ; D1.3 -0.3,85.5 0.424,85.5 0.587,85.337 R1.1@1.263,85.337
  Bottom Layer w0.15: v1(-5.3,68.3) -5.3,72.004 0.464,77.768 0.464,86.265 -0.9,87.629 -0.9,88.043 -0.775,88.168 J1.2
JD_PWR: C2.2 C10.2 C11.2 C12.2 C13.2 C14.2 C15.2 C16.2 C17.2 D3.1 D4.1 D10.1 D11.1 D12.1 D13.1 D14.1 D15.1 D16.1 D17.1 EC1.3 MH3.1 R4.1 U1.1 U1.3 | length 112.8
  Top Layer w0.15: R4.1 0.2,68.092 0.35,67.942 0.35,67.743 0.467,67.626 1.2,67.626 1.218,67.607 1.95,67.607
  Top Layer w0.2: -2.22,76.825 -1.875,76.825 -1.85,76.8 D3.1@-1.25,76.8
  Top Layer w0.5: MH3.1 -4.594,20.406 -2.05,20.406 -1.172,21.284 -1.172,21.684 -0.5,22.356 -0.5,22.612 -0.4,22.712 -0.4,23.257 -0.107,23.55 1.094,23.55 1.95,24.406 1.95,24.96 ; EC1.3@-3.7,78.73 -2.22,77.25 -2.22,76.825 -2.22,76.15 ; U1.3 -1.15,74.2 -1.15,74.35 -2.22,75.42 -2.22,76.15 ; 0.58,75.1 0.792,74.889 0.792,74.158 U1.1 ; C17.2 2.371,23.343 2.65,23.622 2.65,24.76 D17.1 2.65,24.96 1.95,24.96 ; 2.65,79.526 2.65,80.759 D10.1 ; D16.1 1.95,32.96 ; D15.1 1.95,40.96 ; D14.1 1.95,48.96 ; D13.1 1.95,56.959 ; D12.1 1.95,64.959 ; D11.1 2.85,72.659 2.65,72.459 1.95,72.459 ; C16.2 1.95,31.41 ; C15.2 1.95,39.409 ; C14.2 1.95,47.41 ; C13.2 1.95,55.41 ; C12.2 1.95,63.409 ; C11.2 1.95,71.409 ; C10.2 4,79.384 3.509,79.384 2.509,79.384 2.025,78.901 2.025,75.17 1.95,75.095 ; -2.22,76.15 -0.495,76.15 -0.254,75.909 -0.254,75.879 0.1,75.525 0.1,75.475 0.425,75.15 0.475,75.1 0.792,75.1 1.302,75.1 1.307,75.095 1.95,75.095 ; 1.95,24.96 1.95,31.41 ; 1.95,31.41 1.95,32.96 ; 1.95,32.96 1.95,39.409 ; 1.95,39.409 1.95,40.96 ; 1.95,40.96 1.95,47.41 ; 1.95,47.41 1.95,48.96 ; 1.95,48.96 1.95,55.41 ; 1.95,55.41 1.95,56.959 ; 1.95,56.959 1.95,63.409 ; 1.95,63.409 1.95,64.959 ; 1.95,64.959 1.95,67.607 1.95,71.409 ; 1.95,71.409 1.95,72.459 ; 1.95,72.459 1.95,75.095
  Bottom Layer w0.5: EC1.3@-6.575,81.27 -5.3,81.27 -4.375,82.195 -3.317,82.195 -2.775,81.653 -2.775,79.617 EC1.3@-3.521,78.871
JD_STATUS/ICVPP: D6.1 J1.5 U2.3 | length 31.1
  Top Layer w0.15: v1(-4.354,68.3) -4.354,66.921 U2.3 ; v2(-0.4,87.836) -0.4,87.942 0,88.342 0,90.74 J1.5@0.76,91.5
  Top Layer w0.2: D6.1 0.489,80.825 0.856,80.459 v2(0.964,80.459)
  Bottom Layer w0.15: v1(-4.354,68.3) -4.354,72.561 0.863,77.778 v2@0.863,80.459 ; v2(-0.4,87.836) 0.464,87.836 0.863,87.437 v2@0.863,80.459 ; J1.5@0.76,91.5 0.84,91.5 J1.5 ; v2(0.964,80.459) v2@0.863,80.459
NetC1_2: C1.2 FB1.2 R1.2 | length 2.7
  Top Layer w0.25: FB1.2 FB1.2@0.13,84.075 ; FB1.2@0.305,84.25 FB1.2@0.13,84.075 ; C1.2 R1.2 0.392,84.337 FB1.2@0.13,84.075
NetD6_2: D6.2 R2.1 | length 2.2
  Top Layer w0.2: D6.2 -0.595,79.175 0.03,78.55 0.03,78.15 0.151,78.15 R2.1
NetD10_2: D10.2 D11.4 | length 6
  Top Layer w0.15: D11.4 2.85,77.609 2.954,77.505 3.007,77.557 3.225,77.776 3.968,77.776 4.5,78.307 4.5,79.164 4.5,79.717 4.833,80.051 5.8,80.051 6.175,80.426 D10.2@6.175,80.726
NetD11_2: D11.2 D12.4 | length 5.8
  Top Layer w0.15: D12.4 3.655,70.664 4.412,70.664 4.5,70.752 4.5,71.717 4.667,71.884 5.333,71.884 5.358,71.859 6.087,71.859 6.175,71.947 6.175,72.685 6.15,72.709 D11.2
NetD12_2: D12.2 D13.4 | length 5.7
  Top Layer w0.15: D13.4 2.85,62.072 3.225,62.447 3.437,62.447 3.925,62.934 4.333,62.934 4.45,63.052 4.45,63.758 4.676,63.984 6.087,63.984 6.175,64.072 6.175,64.935 D12.2
NetD13_2: D13.2 D14.4 | length 5.7
  Top Layer w0.15: D14.4 2.85,54.072 3.225,54.447 3.437,54.447 3.925,54.935 4.333,54.935 4.45,55.052 4.45,55.46 4.517,55.526 4.517,55.834 4.667,55.984 6.087,55.984 6.175,56.072 6.175,56.935 D13.2
NetD14_2: D14.2 D15.4 | length 5.5
  Top Layer w0.15: D15.4 2.85,46.072 3.225,46.447 3.437,46.447 3.925,46.935 4.333,46.935 4.45,47.052 4.45,47.46 4.55,47.56 4.55,47.907 4.638,47.995 5.721,47.995 5.809,48.083 5.809,48.618 D14.2
NetD15_2: D15.2 D16.4 | length 5.6
  Top Layer w0.15: D16.4 2.85,38.072 3.225,38.447 3.437,38.447 3.925,38.934 4.333,38.934 4.45,39.051 4.45,39.46 4.55,39.56 4.55,39.767 4.768,39.985 6.087,39.985 6.175,40.072 6.175,40.935 D15.2
NetD16_2: D16.2 D17.4 | length 5.8
  Top Layer w0.15: D17.4 2.913,29.797 3.437,29.797 4.45,30.81 4.45,31.797 4.638,31.985 6.087,31.985 6.175,32.072 6.175,32.935 D16.2
RGB_DATA: D10.4 Q1.3 R4.2 | length 18.8
  Top Layer w0.15: Q1.3 1,70.075 R4.2@1.2,70.275
  Top Layer w0.2: v1(0.825,70.775) 0.825,70.7 1.2,70.325 R4.2 R4.2@1.2,70.275 ; v1(2.5,84.6) 2.5,85.509 D10.4
  Bottom Layer w0.2: v1(0.825,70.775) 0.933,70.775 1.275,71.117 1.375,71.117 1.375,72.561 1.361,72.575 1.361,72.741 2.5,73.88 v1(2.5,84.6)
RGB_DATA_MCU: Q1.2 R3.2 U2.7 | length 17.3
  Top Layer w0.15: U2.7 -5.435,72.232 -5.91,72.707 -7.063,72.707 -7.18,72.59 -7.18,66.025 -7.063,65.907 -2.418,65.907 -1.05,67.276 -0.95,67.276 -0.437,66.763 -0.437,66.512 -0.05,66.125 R3.2
pads on no net: D17.2 EC1. U1.4 U2.4 U2.5

## Polygon pours and split planes (outlines as drawn)
no net on Bottom Assy "NONET_L-01_P-001" (hatched 45Degree grid 0.3 track 0.01): -7.5,20 ccw(c-5,20) -5,17.5 -2.729,17.5 5,17.5 ccw(c5,20) 7.5,20 7.5,22.448 7.501,22.448 ccw(c5,20) 1.646,19 -1.646,19 ccw(c-5,20) -7.501,22.449 -7.5,22.449
no net on Bottom Assy "NONET_L-01_P-001" (hatched 45Degree grid 0.3 track 0.02): -7.501,72.449 -7.5,73 cw(c-6.5,73) -6.5,74 -4.1,74 ccw(c-4.1,75) -3.1,75 -3.1,75.7 ccw(c-4.1,75.7) -4.1,76.7 -8.2,76.7 cw(c-8.2,77.5) -9,77.5 -9,82.5 cw(c-8.2,82.5) -8.2,83.3 -4.1,83.3 ccw(c-4.1,84.3) -3.1,84.3 -3.1,85 ccw(c-4.1,85) -4.1,86 -6.5,86 cw(c-6.5,87) -7.5,87 -7.5,87.003 -7.5,90 cw(c-5,90) -5,92.5 -2.729,92.5 -2.75,92.5 cw(c-2.75,92.25) -2.5,92.25 -2.5,92 ccw(c-1.5,92) -1.656,91.012 -1.65,91.015 cw(c-5,90) -2,88.197 -2,73.5 -5,73.5 ccw(c-5,70)
no net on Bottom Assy "NONET_L-01_P-001" (hatched 45Degree grid 0.3 track 0.01): -1.476,91.018 ccw(c-1.476,92.018) -0.476,92.018 -0.476,92.268 cw(c-0.226,92.268) -0.226,92.518 5.024,92.518 cw(c5.024,90.018) 7.524,90.018 7.524,87.569 cw(c5.024,90.018) 1.67,91.018
no net on Bottom Assy "NONET_L-01_P-001" (hatched 45Degree grid 0.15 track 0.01): 3.342,17.5 cw(c5,20) 7.5,21.658 7.5,20 cw(c5,20) 5,17.5
no net on Bottom Assy "NONET_L-01_P-001" (hatched 45Degree grid 0.15 track 0.01): -7.5,21.658 cw(c-5,20) -3.342,17.5 -5,17.5 cw(c-5,20) -7.5,20
no net on Bottom Assy "NONET_L-01_P-001" (hatched 45Degree grid 0.15 track 0.01): 7.5,88.342 cw(c5,90) 3.342,92.5 5,92.5 cw(c5,90) 7.5,90
no net on Bottom Assy "NONET_L-01_P-001" (hatched 45Degree grid 0.15 track 0.01): -7.5,88.342 ccw(c-5,90) -3.342,92.5 -5,92.5 ccw(c-5,90) -7.5,90
no net on Bottom Assy "NONET_L-01_P-001" (hatched 45Degree grid 0.15 track 0.01): -4.3,77.125 -8.2,77.125 cw(c-8.2,77.525) -8.6,77.525 -8.6,77.527 -8.6,82.47 -8.6,82.467 cw(c-8.2,82.467) -8.2,82.867 -8.198,82.867 -4.3,82.867
no net on Fabrication Notes "NONET_L-01_P-001" (hatched 45Degree grid 0.6 track 0.01): -9.5,70 -3,70 -2.988,70 -2.989,84.01 -3,84 -9.5,84 -9.489,84.01

## Keep-outs
Keep-Out Layer:
  region: 7.5,17.5 7.5,19 -7.5,19 -7.5,17.5
  region: 7.5,91 7.5,92.5 -7.6,92.5 -7.6,91

## Other copper
Top Layer:
  region net JD_DATA: -7.215,87.8 -4.9,87.8 -2.8,89.9 -2.8,92.215 -4.984,92.215 -7.215,89.985

## Silkscreen, mask and mechanical layers (free items; w line width, h text height)
Top Overlay:
  lines w0.1: -4.398,86.607 ccw(c-5.024,90) -3.423,86.944 cw(c-3.229,87.72) -4.026,87.653 ; -4.376,86.612 cw(c-4.469,87.052) -4.563,87.492 ccw(c-5.024,90) -4.051,87.643 ; -4.374,23.393 cw(c-5,20) -3.399,23.056 ccw(c-3.206,22.28) -4.003,22.347 ; -4.352,23.388 ccw(c-4.446,22.948) -4.539,22.508 cw(c-5,20) -4.027,22.357 ; -2.677,89.003 cw(c-2.744,88.206) -1.967,88.4 ccw(c-5.024,90) -1.631,89.374 ; -2.666,89.027 ccw(c-5.024,90) -2.516,89.539 cw(c-2.075,89.446) -1.635,89.352 ; -2.653,20.997 ccw(c-2.72,21.794) -1.944,21.6 ; -2.643,20.973 cw(c-5,20) -2.492,20.461 ccw(c-2.052,20.554) -1.612,20.648 ; -1.944,21.601 cw(c-5,20) -1.607,20.626 ; 1.584,20.626 cw(c4.976,20) 1.92,21.601 ; 1.584,89.374 ccw(c4.976,90) 1.92,88.399 cw(c2.696,88.206) 2.629,89.003 ; 1.588,20.648 ccw(c2.028,20.554) 2.469,20.46 ; 1.588,89.352 cw(c2.028,89.446) 2.469,89.54 ; 1.92,21.6 ccw(c2.696,21.794) 2.629,20.997 ; 2.468,20.461 cw(c4.976,20) 2.619,20.973 ; 2.468,89.539 ccw(c4.976,90) 2.619,89.027 ; 3.98,22.347 ccw(c3.182,22.28) 3.376,23.056 cw(c4.976,20) 4.35,23.393 ; 3.98,87.653 cw(c3.182,87.72) 3.376,86.944 ccw(c4.976,90) 4.35,86.607 ; 4.004,22.357 cw(c4.976,20) 4.516,22.508 ; 4.004,87.643 ccw(c4.976,90) 4.516,87.492 ; 4.329,23.388 cw(c4.422,22.948) 4.516,22.508 ; 4.329,86.612 ccw(c4.422,87.052) 4.516,87.492
  lines w0.2: -3.376,87.884 -3.39,87.484 ; -2.997,87.408 -3.39,87.484 ; -2.907,88.345 -2.508,88.366 ; -2.424,87.975 -2.508,88.366 ; -3.39,87.484 ccw(c-5.024,90) -2.508,88.366
  lines w0.33: -4.124,87.445 ccw(c-3.783,87.302) -3.708,86.94 ; -4.1,22.555 cw(c-3.759,22.698) -3.685,23.06 ; -2.469,89.1 cw(c-2.326,88.759) -1.963,88.685 ; -2.445,20.9 ccw(c-2.302,21.241) -1.94,21.315 ; 1.916,21.315 ccw(c2.278,21.241) 2.422,20.9 ; 1.916,88.685 cw(c2.278,88.759) 2.422,89.1 ; 3.661,23.06 cw(c3.735,22.698) 4.077,22.555 ; 3.661,86.94 ccw(c3.735,87.302) 4.077,87.445
  lines w1: -4.454,87.055 ccw(c-5.024,90) -4.309,87.086 ; -4.43,22.945 cw(c-5,20) -4.285,22.914 ; -2.11,89.285 ccw(c-5.024,90) -2.078,89.43 ; -2.086,20.715 cw(c-5,20) -2.055,20.57 ; 2.031,20.57 cw(c4.976,20) 2.063,20.715 ; 2.031,89.43 ccw(c4.976,90) 2.063,89.285 ; 4.262,22.914 cw(c4.976,20) 4.407,22.945 ; 4.262,87.086 ccw(c4.976,90) 4.407,87.055
  text "-" at 3.619,88.146 h3.5 r135
  text "-" at 3.123,21.357 h3.5 r45
  text "+" at -2.95,21.33 h2.8 r315
  text "MSR / RGB / Bar 8" at -3.547,17.7 h0.9
Bottom Overlay:
  lines w0.1: -4.374,23.393 cw(c-5,20) -3.399,23.056 ccw(c-3.206,22.28) -4.003,22.347 ; -4.374,86.607 ccw(c-5,90) -3.399,86.944 cw(c-3.206,87.72) -4.003,87.653 ; -4.352,23.388 ccw(c-4.446,22.948) -4.539,22.508 cw(c-5,20) -4.027,22.357 ; -4.352,86.612 cw(c-4.446,87.052) -4.539,87.492 ccw(c-5,90) -4.027,87.643 ; -2.653,20.997 ccw(c-2.72,21.794) -1.944,21.6 ; -2.653,89.003 cw(c-2.72,88.206) -1.944,88.4 ccw(c-5,90) -1.607,89.374 ; -2.643,20.973 cw(c-5,20) -2.492,20.461 ccw(c-2.052,20.554) -1.612,20.648 ; -2.643,89.027 ccw(c-5,90) -2.492,89.539 cw(c-2.052,89.446) -1.612,89.352 ; -1.944,21.601 cw(c-5,20) -1.607,20.626 ; 1.607,20.626 cw(c5,20) 1.944,21.601 ; 1.607,89.374 ccw(c5,90) 1.944,88.399 cw(c2.72,88.206) 2.653,89.003 ; 1.612,20.648 ccw(c2.052,20.554) 2.492,20.46 cw(c5,20) 2.643,20.973 ; 1.612,89.352 cw(c2.052,89.446) 2.492,89.54 ccw(c5,90) 2.643,89.027 ; 1.944,21.6 ccw(c2.72,21.794) 2.653,20.997 ; 3.399,23.056 cw(c5,20) 4.374,23.393 ; 3.399,86.944 ccw(c5,90) 4.374,86.607 ; 3.4,23.056 cw(c3.206,22.28) 4.003,22.347 ; 3.4,86.944 ccw(c3.206,87.72) 4.003,87.653 ; 4.027,22.357 cw(c5,20) 4.539,22.508 ccw(c4.446,22.948) 4.352,23.388 ; 4.027,87.643 ccw(c5,90) 4.539,87.492 cw(c4.446,87.052) 4.352,86.612
  lines w0.2: -3.352,87.884 -3.366,87.484 ; -2.973,87.408 -3.366,87.484 ; -2.883,88.345 -2.484,88.366 ; -2.401,87.975 -2.484,88.366 ; -3.366,87.484 ccw(c-5,90) -2.484,88.366
  lines w0.33: -4.1,22.555 cw(c-3.759,22.698) -3.685,23.06 ; -4.1,87.445 ccw(c-3.759,87.302) -3.685,86.94 ; -2.445,20.9 ccw(c-2.302,21.241) -1.94,21.315 ; -2.445,89.1 cw(c-2.302,88.759) -1.94,88.685 ; 1.94,21.315 ccw(c2.302,21.241) 2.445,20.9 ; 1.94,88.685 cw(c2.302,88.759) 2.445,89.1 ; 3.685,23.06 cw(c3.759,22.698) 4.1,22.555 ; 3.685,86.94 ccw(c3.759,87.302) 4.1,87.445
  lines w1: -4.43,22.945 cw(c-5,20) -4.285,22.914 ; -4.43,87.055 ccw(c-5,90) -4.285,87.086 ; -2.086,20.715 cw(c-5,20) -2.055,20.57 ; -2.086,89.285 ccw(c-5,90) -2.055,89.43 ; 2.055,20.57 cw(c5,20) 2.086,20.715 ; 2.055,89.43 ccw(c5,90) 2.086,89.285 ; 4.285,22.914 cw(c5,20) 4.43,22.945 ; 4.285,87.086 ccw(c5,90) 4.43,87.055
  text "-" at 3.643,88.146 h3.5 r135
  text "'.ProjectCodenameID' V'.ProjectRevision'" at -1,83.35 h1.1 r90
  text "-" at 3.146,21.357 h3.5 r45
  text "+" at -2.95,21.33 h2.8 r315
Fabrication Notes:
  lines w0.01: -9.5,73 -3,73 ; -9.5,87 -3,87 ; -9.489,87.01 -9.488,73 ; -2.989,87.01 -2.988,73
  lines w0.2: -11.25,79.8 -7.4,77.5 -5.65,77.5 ; -11.25,80.2 -7.4,82.5 -5.65,82.5 ; -11.25,86 -9.5,86
  text "no board edge pips/ / rat's teeth/mouse bites  / in this region - make  / sure board edge is clean" at -27.397,84 h1.7
  text "non-plated slots x2" at -22.299,79.593 h1.7
Board Outline:
  lines w0.2: -7.5,86.97 -7.5,90 cw(c-5,90) -5,92.5 -2.75,92.5 cw(c-2.75,92.25) -2.5,92.25 -2.5,92 ccw(c-1.5,92) -0.5,92 -0.5,92.25 cw(c-0.25,92.25) -0.25,92.5 5,92.5 cw(c5,90) 7.5,90 ; -7.5,87 ccw(c-6.5,87) -6.5,86 -4.1,86 cw(c-4.1,85) -3.1,85 -3.1,84.3 ; -4.1,76.7 -8.2,76.7 cw(c-8.2,77.5) -9,77.5 -9,82.5 cw(c-8.2,82.5) -8.2,83.3 -4.1,83.3 ; -4.1,76.7 cw(c-4.1,75.7) -3.1,75.7 -3.1,75 cw(c-4.1,75) -4.1,74 -6.5,74 ccw(c-6.5,73) -7.5,73 -7.5,66 ccw(c-6.5,66) -6.5,65 0.5,65 cw(c0.5,64) 1.5,64 1.5,25 cw(c0.5,25) 0.5,24 -6.5,24 ccw(c-6.5,23) -7.5,23 -7.5,20 ccw(c-5,20) -5,17.5 5,17.5 ccw(c5,20) 7.5,20 7.5,84 7.5,90 ; -4.098,83.3 ccw(c-4.098,84.3) -3.098,84.3 ; 3,85 cw(c4,85) 4,86 6.5,86
Component Keepout Dwg:
  lines w0.01: -7.5,73 cw(c-6.5,73) -6.5,74 -4.1,74 ccw(c-4.1,75) -3.1,75 -3.1,75.7 ccw(c-4.1,75.7) -4.1,76.7 -8.2,76.7 cw(c-8.2,77.5) -9,77.5 -9,82.5 cw(c-8.2,82.5) -8.2,83.3 -4.1,83.3 ccw(c-4.1,84.3) -3.1,84.3 -3.1,85 ccw(c-4.1,85) -4.1,86 -6.5,86 cw(c-6.5,87) -7.5,87
  lines w0.02: -7.501,72.449 -7.5,73 ; -5,73.5 -2,73.5
  lines w0.025: -7.501,72.449 cw(c-5,70) -5,73.5 ; -7.5,87.003 -7.5,90 cw(c-5,90) -5,92.5 -2.729,92.5 ; -2.75,92.5 cw(c-2.75,92.25) -2.5,92.25 -2.5,92 ccw(c-1.5,92) -1.656,91.012 ; -2,73.5 -2,88.197 ccw(c-5,90) -1.65,91.015 ; -1.5,91 ccw(c-1.5,92) -0.5,92 -0.5,92.25 cw(c-0.25,92.25) -0.25,92.5 ; 7.5,22.448 7.5,20 cw(c5,20) 5,17.5 -2.729,17.5 -5,17.5 cw(c-5,20) -7.5,20 -7.5,22.449 cw(c-5,20) -1.646,19 1.646,19 cw(c5,20) 7.501,22.448

## Text inside footprints (layer, text, board x,y; h text height)
EC1: Mechanical 9 "Jacdac / cable connector  / body" at -13.158,75.179 h1.7 r90